# EAGLE board Pure Sequencer (EAGLE 8.7.0)
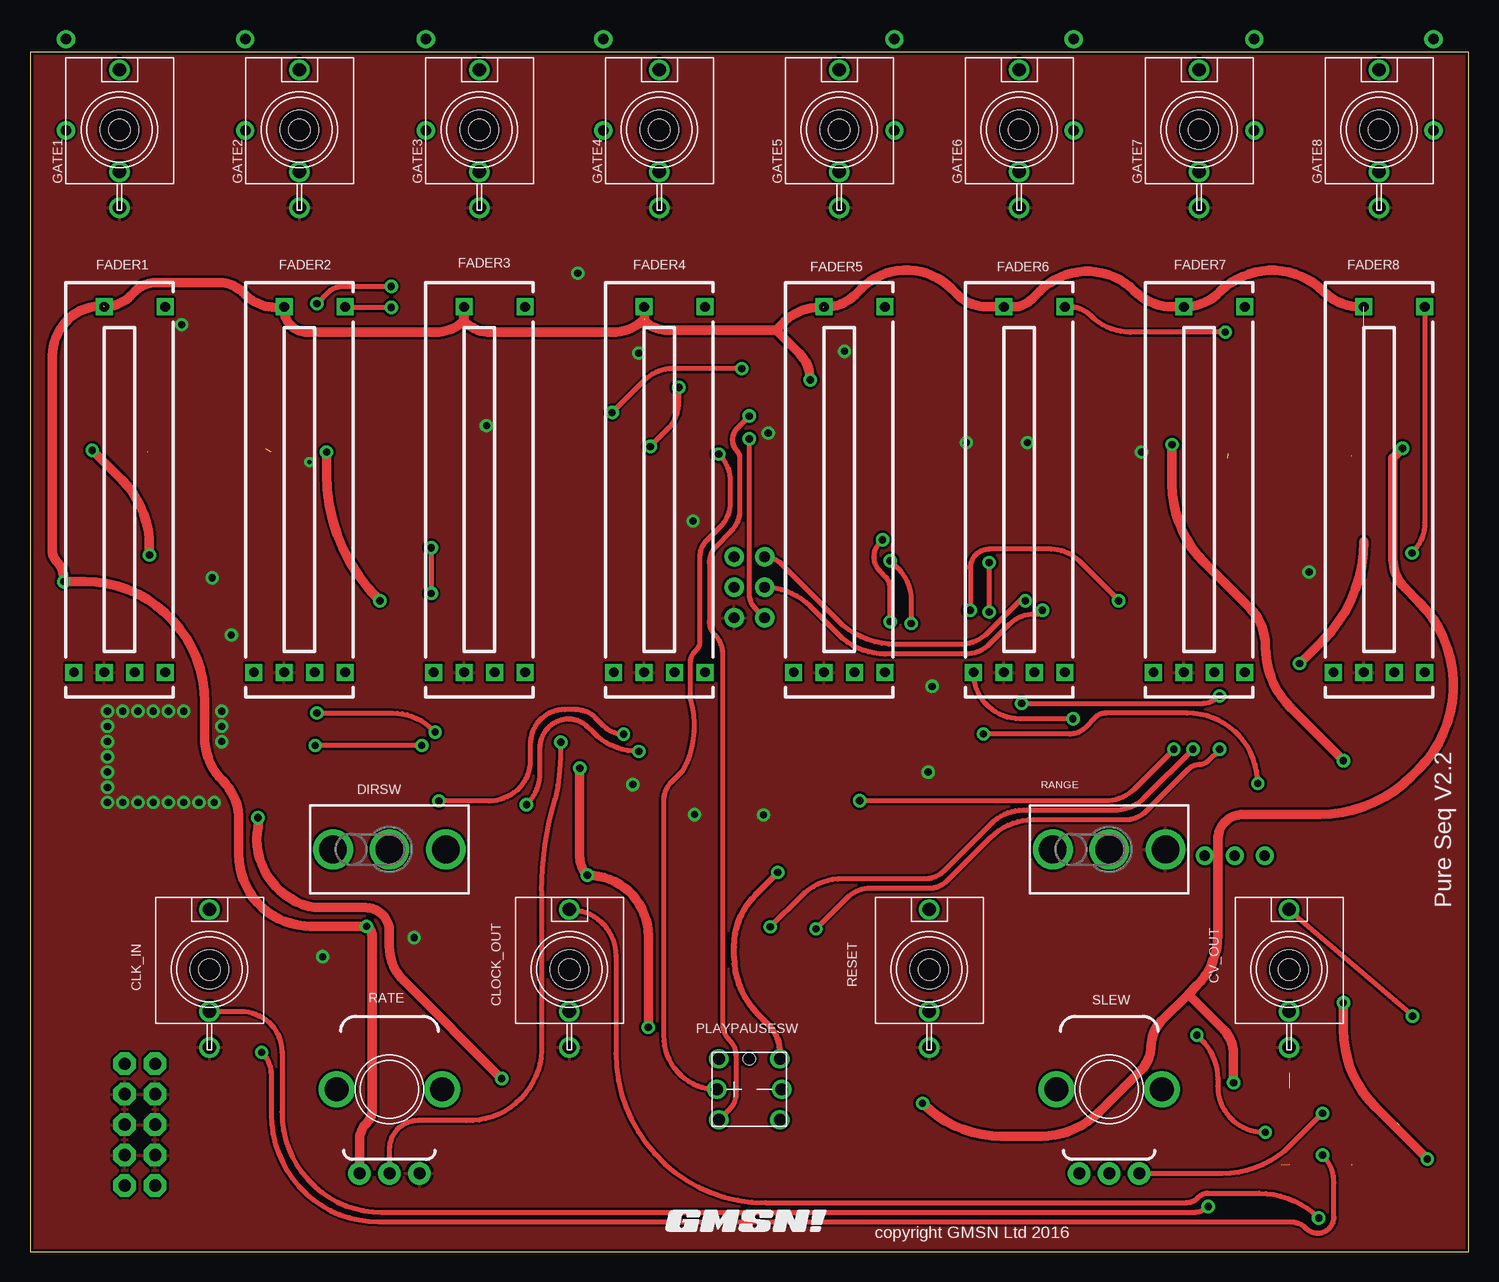
[diagram p0: board, top side]
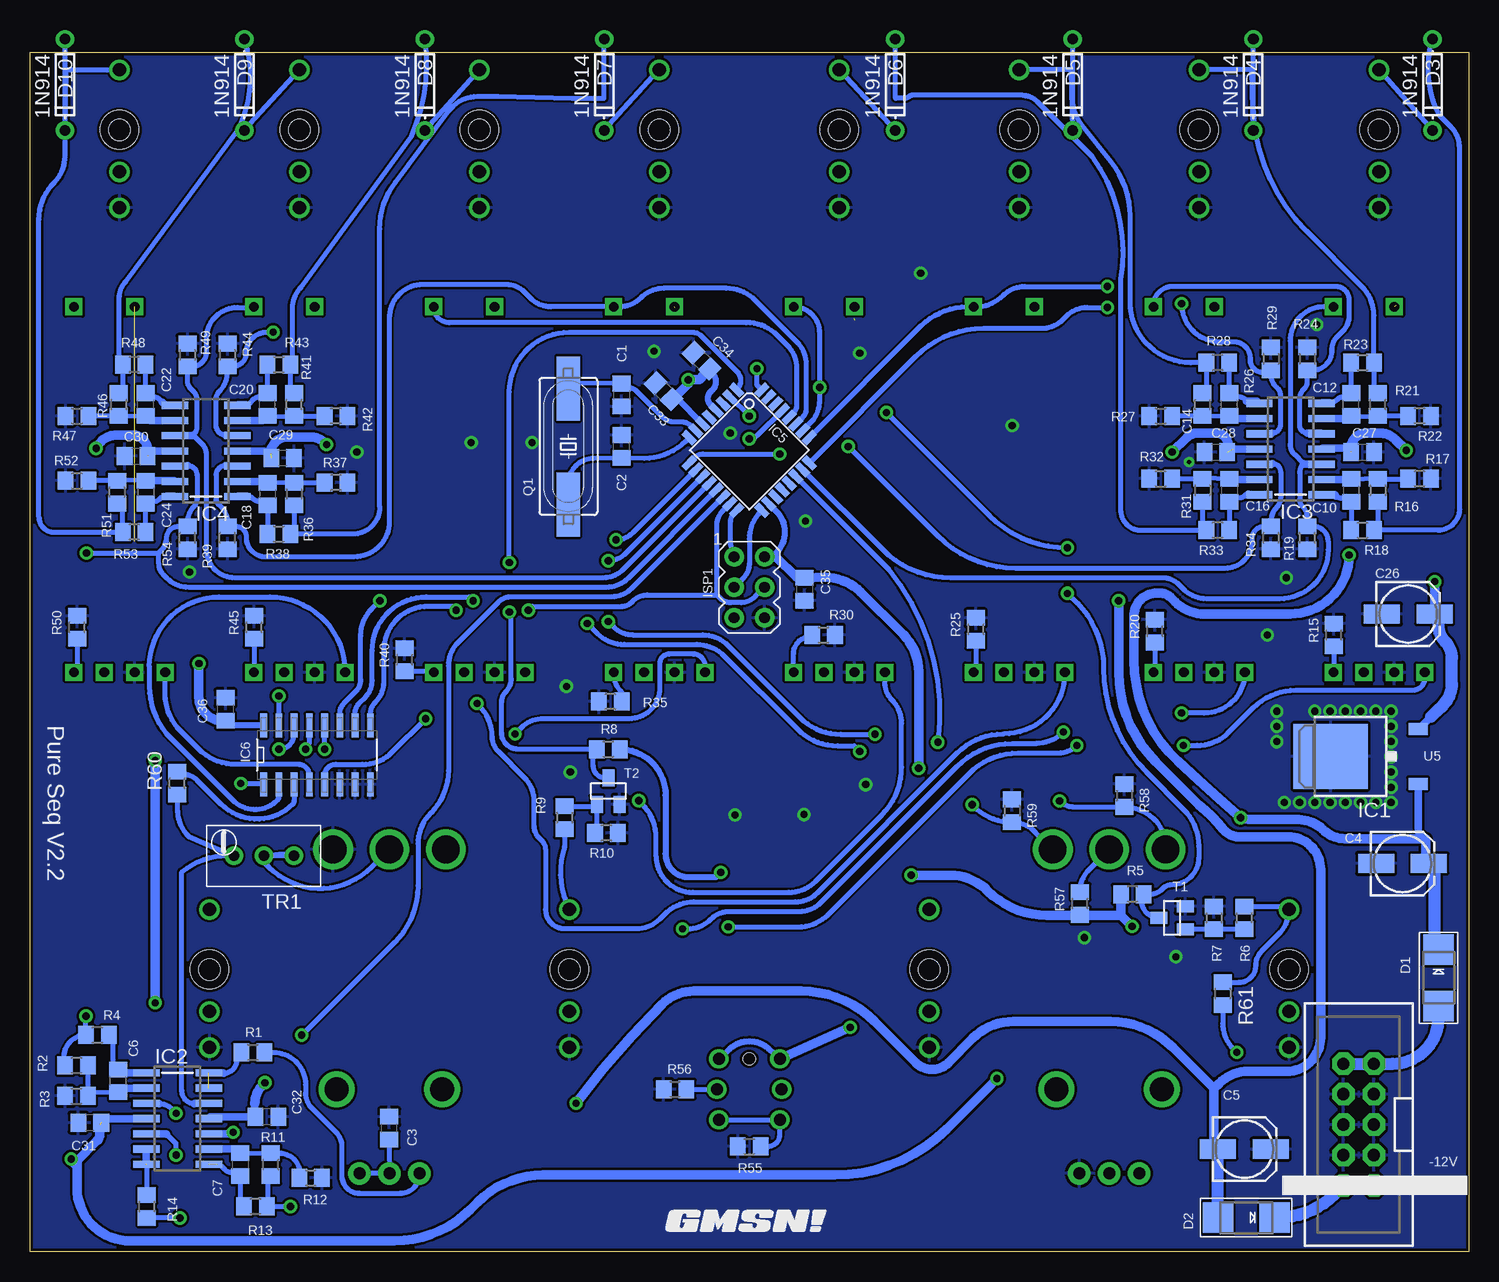
[diagram p1: board, bottom side, seen from below]

Size 119.92 x 100 mm. Coordinates in mm from the lower left corner, seen from the top.
Outline: 0,0 119.92,0 119.92,100 0,100 0,0
Copper layers (1*16): Top 0.035mm / dielectric 1.5mm / Bottom 0.035mm
Design rules "SparkFun": minimum track width 8mil, minimum drill 20mil, track to track 8mil, track to pad 8mil, pad to pad 8mil, via to via 8mil, smd to smd 8mil, copper to edge 10mil, drill to drill 8mil, minimum pad ring 12mil, minimum via ring 10mil, stop-mask expansion 4mil, vias tented up to drill 25mil, thermal gap 10mil
Holes 3.2 mm at 7.46,93.52 22.46,93.52 37.46,93.52 52.46,93.52 67.46,93.52 82.46,93.52 97.46,93.52 112.46,93.52 104.96,23.52 74.96,23.52 44.96,23.52 14.96,23.52

## Footprints (pad centres in the part's own frame; a part is rotated, then mirrored left to right if it is on the bottom)
C0805 = smd 1.3 x 1.5: 1 -0.95,0; 2 0.95,0
153CLV-0505 = smd 3 x 1.6: + 2.2,0; - -2.2,0
PJ301M-12 = drill 1.1: GND 0,-6.5; NORM 0,-3.5; TIP 0,5 | hole 1.778: 0,0
SMADIODE = smd 2.54 x 2.54: A 2.349,0; C -2.349,0
DO-41 = drill 0.9: A -3.81,0; C 3.81,0
TOGGLE_SW = drill 2.3: 1 -4.7,0; 2 0,0; 3 4.7,0
FADER_20MM_LED = drill 0.8 square: 1 -1.27,15.24; 2 -3.81,-15.24; 3 -1.27,-15.24; A 3.81,15.24; K 3.81,-15.24; P$3 1.27,-15.24
POTENTIOMETER_9MM = drill 1 pad 1.88: P$1 -2.5,-7; P$2 0,-7; P$3 2.5,-7 | drill 2 pad 2.68: P$4 -4.4,0; P$5 4.4,0
TO252 = smd 1 x 1.6: 1 -2.28,-4.8; 2 2.28,-4.8 | smd 5.4 x 6.2: 3 0,2.5
SO14 = smd 0.6 x 2.2: 1 -3.81,-2.6; 2 -2.54,-2.6; 3 -1.27,-2.6; 4 0,-2.6; 5 1.27,-2.6; 6 2.54,-2.6; 7 3.81,-2.6; 8 3.81,2.6; 9 2.54,2.6; 10 1.27,2.6; 11 0,2.6; 12 -1.27,2.6; 13 -2.54,2.6; 14 -3.81,2.6
TQFP32-08 = smd 1.27 x 0.559: 1 -4.293,2.8; 2 -4.293,2; 3 -4.293,1.2; 4 -4.293,0.4; 5 -4.293,-0.4; 6 -4.293,-1.2; 7 -4.293,-2; 8 -4.293,-2.8; 17 4.293,-2.8; 18 4.293,-2; 19 4.293,-1.2; 20 4.293,-0.4; 21 4.293,0.4; 22 4.293,1.2; 23 4.293,2; 24 4.293,2.8 | smd 0.559 x 1.27: 9 -2.8,-4.293; 10 -2,-4.293; 11 -1.2,-4.293; 12 -0.4,-4.293; 13 0.4,-4.293; 14 1.2,-4.293; 15 2,-4.293; 16 2.8,-4.293; 25 2.8,4.293; 26 2,4.293; 27 1.2,4.293; 28 0.4,4.293; 29 -0.4,4.293; 30 -1.2,4.293; 31 -2,4.293; 32 -2.8,4.293
SOIC_16 = smd 1.981 x 0.559: 1 -2.464,4.445; 2 -2.464,3.175; 3 -2.464,1.905; 4 -2.464,0.635; 5 -2.464,-0.635; 6 -2.464,-1.905; 7 -2.464,-3.175; 8 -2.464,-4.445; 9 2.464,-4.445; 10 2.464,-3.175; 11 2.464,-1.905; 12 2.464,-0.635; 13 2.464,0.635; 14 2.464,1.905; 15 2.464,3.175; 16 2.464,4.445
AVRISP = drill 0.9 pad 1.626: 1 -1.27,2.54; 2 1.27,2.54; 3 -1.27,0; 4 1.27,0; 5 -1.27,-2.54; 6 1.27,-2.54
2X5-SHROUDED = drill 1.016 pad 1.88 octagon: 1 -1.27,5.08; 2 1.27,5.08; 3 -1.27,2.54; 4 1.27,2.54; 5 -1.27,0; 6 1.27,0; 7 -1.27,-2.54; 8 1.27,-2.54; 9 -1.27,-5.08; 10 1.27,-5.08
HC49UP = smd 5.334 x 1.93: 1 -4.826,0; 2 4.826,0
R0805 = smd 1.3 x 1.5: 1 -0.95,0; 2 0.95,0
PB6149L = drill 1: 1 2.54,-2.54; 2 2.54,2.54; 3 -2.54,-2.54; 4 -2.54,2.54; A 0,-2.7; K 0,2.7 | hole 1: -2.54,0
SOT23 = smd 1 x 1.4: 1 -0.95,-1.1; 2 0.95,-1.1; 3 0,1.1
TRIMMER_TH = drill 0.9: 1 -0.802,1.143; 2 -3.302,1.143; 3 -5.802,1.143

## Placement (x,y rotation side)
C1  22pF  [C0805]  70.6,71.4 270 bottom
C2  22pF  [C0805]  70.6,67.12 90 bottom
C3  1u  [C0805]  89.96,10.29 90 bottom
C4  10uF  [153CLV-0505]  5.51,32.35 0 bottom
C5  10uF  [153CLV-0505]  18.68,8.54 0 bottom
C6  47pF  [C0805]  112.56,14.23 90 bottom
C7  47pF  [C0805]  102.39,7.25 270 bottom
C10  100pF  [C0805]  9.79,63.47 270 bottom
C12  100pF  [C0805]  9.79,70.61 90 bottom
C14  100pF  [C0805]  19.95,70.61 90 bottom
C16  100pF  [C0805]  19.95,63.47 270 bottom
C18  100pF  [C0805]  100.12,63.15 270 bottom
C20  100pF  [C0805]  100.12,70.61 90 bottom
C22  100pF  [C0805]  110.28,70.61 90 bottom
C24  100pF  [C0805]  110.28,63.31 270 bottom
C26  10uF  [153CLV-0505]  5.03,53.15 0 bottom
C27  100nF  [C0805]  8.84,66.64 0 bottom
C28  100nF  [C0805]  21.07,66.64 0 bottom
C29  100nF  [C0805]  98.85,66.16 0 bottom
C30  100nF  [C0805]  111.08,66.32 0 bottom
C31  100nF  [C0805]  114.94,10.74 180 bottom
C32  100nF  [C0805]  100.17,11.22 180 bottom
C33  100nF  [C0805]  67.1,71.72 135 bottom
C34  100nF  [C0805]  63.93,74.26 135 bottom
C35  100nF  [C0805]  55.36,55.21 270 bottom
C36  100nF  [C0805]  103.62,45.21 90 bottom
CLK_IN  PJ301M-12  [PJ301M-12]  14.96,23.52 0 top
CLOCK_OUT  PJ301M-12  [PJ301M-12]  44.96,23.52 0 top
CV_OUT  PJ301M-12  [PJ301M-12]  104.96,23.52 0 top
D1  STTH102A  [SMADIODE]  2.49,22.83 270 bottom
D2  STTH102A  [SMADIODE]  18.53,2.82 180 bottom
D3  1N914  [DO-41]  3,97.27 270 bottom
D4  1N914  [DO-41]  17.95,97.27 270 bottom
D5  1N914  [DO-41]  33,97.27 270 bottom
D6  1N914  [DO-41]  47.79,97.27 270 bottom
D7  1N914  [DO-41]  72.05,97.27 270 bottom
D8  1N914  [DO-41]  87,97.27 270 bottom
D9  1N914  [DO-41]  102.05,97.27 270 bottom
D10  1N914  [DO-41]  117,97.27 270 bottom
DIRSW  SWITCH_TOGGLE  [TOGGLE_SW]  29.96,33.52 0 top
FADER1  100k  [FADER_20MM_LED]  7.46,63.52 0 top
FADER2  100k  [FADER_20MM_LED]  22.46,63.52 0 top
FADER3  100k  [FADER_20MM_LED]  37.46,63.52 0 top
FADER4  100k  [FADER_20MM_LED]  52.46,63.52 0 top
FADER5  100k  [FADER_20MM_LED]  67.46,63.52 0 top
FADER6  100k  [FADER_20MM_LED]  82.46,63.52 0 top
FADER7  100k  [FADER_20MM_LED]  97.46,63.52 0 top
FADER8  100k  [FADER_20MM_LED]  112.46,63.52 0 top
GATE1  PJ301M-12  [PJ301M-12]  7.46,93.52 0 top
GATE2  PJ301M-12  [PJ301M-12]  22.46,93.52 0 top
GATE3  PJ301M-12  [PJ301M-12]  37.46,93.52 0 top
GATE4  PJ301M-12  [PJ301M-12]  52.46,93.52 0 top
GATE5  PJ301M-12  [PJ301M-12]  67.46,93.52 0 top
GATE6  PJ301M-12  [PJ301M-12]  82.46,93.52 0 top
GATE7  PJ301M-12  [PJ301M-12]  97.46,93.52 0 top
GATE8  PJ301M-12  [PJ301M-12]  112.46,93.52 0 top
GLIDE  B100k  [POTENTIOMETER_9MM]  89.96,13.52 0 top
IC1  BA178M05FP  [TO252]  9,41.27 90 bottom
IC2  TL074  [SO14]  107.62,11.08 270 bottom
IC3  TL074  [SO14]  14.84,66.9 90 bottom
IC4  TL074  [SO14]  105.24,66.74 90 bottom
IC5  ATMEGA328P  [TQFP32-08]  59.96,66.8 315 bottom
IC6  CD4051  [SOIC_16]  96,41.4 90 bottom
ISP1  HEADER2X3-6  [AVRISP]  59.96,55.37 0 bottom
JP1  HEADER2X5SHD  [2X5-SHROUDED]  9.16,10.58 180 bottom
Q1  20MHz  [HC49UP]  75.04,67.12 90 bottom
R1  0R  [R0805]  101.34,16.6 0 bottom
R2  34k  [R0805]  116.05,15.5 180 bottom
R3  56k  [R0805]  116.05,12.96 0 bottom
R4  0R  [R0805]  114.3,18.04 180 bottom
R5  10k  [R0805]  28.02,29.78 180 bottom
R6  100k  [R0805]  18.68,27.81 90 bottom
R7  1M  [R0805]  21.23,27.81 270 bottom
R8  10k  [R0805]  71.71,41.88 0 bottom
R9  100k  [R0805]  75.36,36.16 270 bottom
R10  1M  [R0805]  71.87,34.89 180 bottom
R11  100k  [R0805]  99.86,7.25 90 bottom
R12  100k  [R0805]  96.52,6.14 0 bottom
R13  1k  [R0805]  101.12,3.76 180 bottom
R14  1k  [R0805]  110.17,3.76 90 bottom
R15  330R  [R0805]  11.22,51.4 90 bottom
R16  100k  [R0805]  7.57,63.47 270 bottom
R17  100k  [R0805]  4.08,64.42 180 bottom
R18  1k  [R0805]  8.84,60.13 0 bottom
R19  100k  [R0805]  13.45,59.5 90 bottom
R20  330R  [R0805]  26.15,51.72 90 bottom
R21  100k  [R0805]  7.57,70.61 90 bottom
R22  100k  [R0805]  4.08,69.66 180 bottom
R23  1k  [R0805]  8.84,74.1 0 bottom
R24  100k  [R0805]  13.45,74.42 270 bottom
R25  330R  [R0805]  41.07,51.88 90 bottom
R26  100k  [R0805]  22.18,70.61 90 bottom
R27  100k  [R0805]  25.67,69.66 0 bottom
R28  1k  [R0805]  20.91,74.1 180 bottom
R29  100k  [R0805]  16.46,74.42 270 bottom
R30  330R  [R0805]  53.77,51.4 0 bottom
R31  100k  [R0805]  22.18,63.47 270 bottom
R32  100k  [R0805]  25.67,64.42 0 bottom
R33  1k  [R0805]  20.91,60.13 180 bottom
R34  100k  [R0805]  16.46,59.5 90 bottom
R35  330R  [R0805]  71.55,45.84 180 bottom
R36  100k  [R0805]  97.9,63.15 270 bottom
R37  100k  [R0805]  94.41,64.1 180 bottom
R38  1k  [R0805]  99.17,59.81 0 bottom
R39  100k  [R0805]  103.46,59.5 90 bottom
R40  330R  [R0805]  88.69,49.34 90 bottom
R41  100k  [R0805]  97.9,70.61 90 bottom
R42  100k  [R0805]  94.41,69.66 180 bottom
R43  1k  [R0805]  99.17,73.94 0 bottom
R44  100k  [R0805]  103.46,74.74 270 bottom
R45  330R  [R0805]  101.23,52.04 90 bottom
R46  100k  [R0805]  112.51,70.61 90 bottom
R47  100k  [R0805]  116,69.66 0 bottom
R48  1k  [R0805]  111.24,73.94 180 bottom
R49  100k  [R0805]  106.79,74.74 270 bottom
R50  330R  [R0805]  116,52.04 90 bottom
R51  100k  [R0805]  112.67,63.31 270 bottom
R52  100k  [R0805]  116,64.26 0 bottom
R53  1k  [R0805]  111.24,59.97 180 bottom
R54  100k  [R0805]  106.79,59.5 90 bottom
R55  100k  [R0805]  59.96,8.76 0 bottom
R56  330R  [R0805]  66.15,13.52 0 bottom
R57  1k  [R0805]  32.4,29.02 90 bottom
R58  100k  [R0805]  28.69,38.01 270 bottom
R59  100k  [R0805]  38.05,36.74 270 bottom
R60  200k  [R0805]  107.64,39.04 90 bottom
R61  100k  [R0805]  20.5,21.5 270 bottom
RANGE  SWITCH_TOGGLE  [TOGGLE_SW]  89.96,33.52 0 top
RATE  B100k  [POTENTIOMETER_9MM]  29.96,13.52 0 top
RESET  PJ301M-12  [PJ301M-12]  74.96,23.52 0 top
SW1  [PB6149L]  59.96,13.52 270 top
T1  MMBT3904  [SOT23]  24.72,27.81 90 bottom
T2  MMBT3904  [SOT23]  71.71,38.38 0 bottom
TR1  100k  [TRIMMER_TH]  103.73,34.14 180 bottom
U$1  [GMSN!_LOGO]  59.96,2.48 0 top
U$2  [GMSN!_LOGO]  59.96,2.48 0 bottom

## Library data of the parts
C1-C3 C6 C7 C10 C12 C14 C16 C18 C20 C22 C24 C27-C36 = GMSN; SORT: 3
C4 C5 C26 = GMSN; SORT: 6
CLK_IN CLOCK_OUT CV_OUT GATE1-GATE8 GLIDE RATE RESET = GMSN; SORT: 8
D1-D10 = GMSN; SORT: 1
DIRSW RANGE SW1 = GMSN; SORT: 9
FADER1-FADER8 ISP1 JP1 TR1 = GMSN; SORT: 7
IC1-IC6 T1 T2 = GMSN; SORT: 4
Q1 = GMSN; SORT: 5
R1-R61 = GMSN; SORT: 2
U$1 U$2 = gmsnLogo

## Nets
5V: C26.+ C33.1 C34.1 C35.1 C36.1 FADER1.1 FADER2.1 FADER3.1 FADER4.1 FADER5.1 FADER6.1 FADER7.1 FADER8.1 IC1.2 IC5.4 IC5.6 IC5.18 IC6.16 ISP1.2 R5.2 R8.2 R57.1 RATE.P$1 SW1.3 SW1.4
+12V: C4.+ C27.1 C29.1 C31.1 D1.C IC1.1 IC2.4 IC3.4 IC4.4
-12V: C5.- C28.2 C30.2 C32.2 D2.A IC2.11 IC3.11 IC4.11
A: IC5.15 IC6.11 ISP1.4
B: IC5.16 IC6.10 ISP1.1
C: IC5.17 IC6.9 ISP1.3
CLK_IN: IC5.32 R5.1 T1.3
CLK_OUT: IC2.10 IC5.14
G0: FADER1.A IC3.3 IC5.23 R19.2
G1: FADER2.A IC3.5 IC5.24 R24.2
G2: FADER3.A IC3.10 IC5.25 R29.2
G3: FADER4.A IC3.12 IC5.26 R34.2
G4: FADER5.A IC4.3 IC5.27 R39.2
G5: FADER6.A IC4.5 IC5.28 R44.2
G6: FADER7.A IC4.10 IC5.12 R49.2
G7: FADER8.A IC4.12 IC5.13 R54.2
GND: C1.2 C2.2 C3.2 C4.- C5.+ C26.- C27.2 C28.1 C29.2 C30.1 C31.2 C32.1 C33.2 C34.2 C35.2 C36.2 CLK_IN.GND CLOCK_OUT.GND CV_OUT.GND FADER1.3 FADER2.3 FADER3.3 FADER4.3 FADER5.3 FADER6.3 FADER7.3 FADER8.3 GATE1.GND GATE2.GND GATE3.GND GATE4.GND GATE5.GND GATE6.GND GATE7.GND GATE8.GND IC1.3 IC5.3 IC5.5 IC5.21 IC6.6 IC6.7 IC6.8 ISP1.6 JP1.3 JP1.4 JP1.5 JP1.6 JP1.7 JP1.8 R3.1 R7.1 R10.1 R12.2 R15.2 R17.1 R19.1 R20.2 R22.1 R24.1 R25.2 R27.1 R29.1 R30.2 R32.1 R34.1 R35.2 R37.1 R39.1 R40.2 R42.1 R44.1 R45.2 R47.1 R49.1 R50.2 R52.1 R54.1 R55.1 R56.1 R58.1 R59.1 RANGE.3 RATE.P$3 RESET.GND T1.2 T2.2
N$1: C1.1 IC5.7 Q1.2
N$2: C2.1 IC5.8 Q1.1
N$3: IC2.12 R60.1 TR1.1
N$4: IC2.13 IC2.14 R1.1
N$5: GLIDE.P$1 R1.2
N$6: FADER8.2 IC6.4
N$7: FADER7.2 IC6.2
N$8: FADER6.2 IC6.5
N$9: D1.A JP1.9 JP1.10
N$10: D2.C JP1.1 JP1.2
N$11: FADER5.2 IC6.1
N$12: FADER4.2 IC6.12
N$13: FADER3.2 IC6.15
N$14: FADER2.2 IC6.14
N$15: FADER1.2 IC6.13
N$16: C3.1 GLIDE.P$2 GLIDE.P$3 IC2.3
N$17: R6.1 R7.2 T1.1
N$18: IC2.5 R61.2
N$19: C6.1 IC2.2 R2.1 R3.2
N$20: C6.2 IC2.1 R4.1
N$21: CV_OUT.TIP R2.2 R4.2
N$22: R9.1 R10.2 T2.1
N$23: R9.2 RESET.TIP
N$24: C7.1 IC2.9 R11.2 R12.1
N$25: C7.2 IC2.8 R13.2
N$26: CLK_IN.TIP R6.2 R61.1
N$27: IC2.6 IC2.7 R14.2
N$28: CLOCK_OUT.TIP R14.1
N$29: CLK_IN.NORM R11.1 R13.1
N$30: IC5.22 RATE.P$2
N$31: FADER1.K R15.1
N$32: C10.1 IC3.2 R16.1 R17.2
N$33: C10.2 IC3.1 R18.1
N$34: D3.A R16.2 R18.2
N$35: FADER3.K R25.1
N$36: FADER2.K R20.1
N$37: C12.1 IC3.6 R21.1 R22.2
N$38: C12.2 IC3.7 R23.1
N$39: D4.A R21.2 R23.2
N$40: C14.1 IC3.9 R26.1 R27.2
N$41: C14.2 IC3.8 R28.1
N$42: D5.A R26.2 R28.2
N$43: FADER4.K R30.1
N$44: C16.1 IC3.13 R31.1 R32.2
N$45: C16.2 IC3.14 R33.1
N$46: D6.A R31.2 R33.2
N$47: FADER5.K R35.1
N$48: C18.1 IC4.2 R36.1 R37.2
N$49: C18.2 IC4.1 R38.1
N$50: D7.A R36.2 R38.2
N$51: FADER6.K R40.1
N$52: C20.1 IC4.6 R41.1 R42.2
N$53: C20.2 IC4.7 R43.1
N$54: D8.A R41.2 R43.2
N$55: FADER7.K R45.1
N$56: C22.1 IC4.9 R46.1 R47.2
N$57: C22.2 IC4.8 R48.1
N$58: D9.A R46.2 R48.2
N$59: FADER8.K R50.1
N$60: C24.1 IC4.13 R51.1 R52.2
N$61: C24.2 IC4.14 R53.1
N$62: D10.A R51.2 R53.2
N$63: IC5.2 R55.2 SW1.1 SW1.2
N$64: IC5.9 SW1.A
N$65: R56.2 SW1.K
N$66: DIRSW.2 R57.2
N$67: DIRSW.1 IC5.10 R58.2
N$68: DIRSW.3 IC5.11 R59.2
N$69: IC6.3 R60.2
N$70: RANGE.2 TR1.2 TR1.3
N$71: D6.C GATE4.TIP
N$72: D5.C GATE3.TIP
N$73: D4.C GATE2.TIP
N$74: D3.C GATE1.TIP
N$75: D10.C GATE8.TIP
N$76: D9.C GATE7.TIP
N$77: D8.C GATE6.TIP
N$78: D7.C GATE5.TIP
RESET: IC5.1 R8.1 T2.3
RST: IC5.29 ISP1.5

## Tracks (layer width: path | path; a pad name or v marks a point on that pad's centre or on a via)
5V  (via drill 0.6)  (4 unrouted)
  Top 0.5: SW1.4 62.5,16.64 arc45 61.56,18.91 60.64,19.82 arc-45 58.69,24.54 58.69,25.38 arc-45 60.51,29.77 v62.34,31.61
  Top 0.8: RATE.P$1 27.46,9.26 arc-45 28.06,10.71 arc45 28.53,11.83 28.53,26.12 arc45 28.05,27.27 v28.05,27.11 23.39,27.11 arc-90 17.41,33.09 17.41,35.97 arc45 16.04,39.28 arc-45 14.56,42.87 14.56,45.83 arc90 4.54,55.85 v2.81,55.85 2.81,56.09 arc45 2.2,57.57 arc-45 1.86,58.39 1.86,74.64 arc-90 6.08,78.86 | 62.55,16.06 SW1.4 | 51.19,77.63 51.23,77.59 arc45 53.14,76.8 62.18,76.8 | 62.18,76.8 62.9,77.52 arc-45 65.77,78.71 66.14,78.71 | 111.19,59.2 arc-45 107.77,50.95 v105.84,49.02 | 62.18,76.8 64.14,74.84 arc-45 v65.04,72.67 | v51.55,18.69 51.55,26.29 arc90 v46.47,31.37 arc-45 45.83,32.9 v45.83,40.29 | FADER1.1 arc45 8.37,79.66 8.78,80.07 arc-45 10.46,80.77 15.84,80.77 arc-45 17.71,80 17.93,79.78 arc45 20.52,78.71 21.14,78.71 FADER2.1 21.19,78.51 arc90 23.06,76.64 33.85,76.64 arc45 36.15,77.59 36.15,78.72 FADER3.1 36.19,77.55 arc45 38.39,76.64 48.55,76.64 arc45 51.23,77.75 51.23,78.72 FADER4.1 | FADER5.1 66.4,78.76 arc45 68.78,79.75 69.3,80.26 arc-90 76.82,80.26 77.32,79.76 arc45 79.74,78.76 FADER6.1 81.99,78.76 arc45 83.5,79.39 84.2,80.08 arc-90 92.08,80.08 arc45 95.27,78.76 FADER7.1 arc45 99.2,80.01 arc-90 107.87,80.01 arc45 110.88,78.76 FADER8.1
  Bottom 0.4: R57.1 32.34,28.04
  Bottom 0.5: IC6.16 103.27,43.86 C36.1 | IC5.4 63.19,70.6 arc90 63.19,71.66 63.02,71.84 arc-90 63.02,73.19 63.22,73.39 C34.1 | IC5.6 66,71.14 66,71.41 | IC5.18 57.74,61.75 arc90 57.74,58.23 57.74,57.91 | R8.2 arc90 66.94,38.06 66.94,33.15 arc-90 65.01,31.21 62.73,31.21 v62.34,31.61 | SW1.3 58.33,16.88 arc-84 61.59,16.88 SW1.4
  Bottom 0.61: 2.72,44.99 4.15,43.55 IC1.2
  Bottom 0.8: v2.81,55.85 2.83,55.82 C26.+ | v105.84,49.02 105.84,46.19 arc-90 103.9,44.26 103.66,44.26 C36.1 | C34.1 64.1,72.67 v65.04,72.67 65.04,72.37 66,71.41 C33.1 | ISP1.2 57.74,57.91 56.04,56.21 C35.1 53.66,56.21 arc45 50.68,54.98 47.13,51.43 arc45 45.83,48.3 v45.83,40.29 | v51.55,18.69 SW1.3 | R5.2 28.97,28.04 | 28.97,28.04 v28.05,27.11 | v46.47,31.37 43.22,31.37 arc45 40.09,30.08 arc-45 35.17,28.04 32.34,28.04 28.98,28.04 28.97,28.04
  Bottom 1.016: 3.13,44.57 2.72,44.99 2.08,45.62 arc-45 1.38,47.32 1.38,49.46 arc-45 1.97,50.88 arc45 2.49,52.14 2.49,52.81 C26.+
+12V  (via drill 0.6)  (3 unrouted)
  Top 0.8: v9.95,58.07 9.95,58.83 arc45 7.69,64.3 v5.19,66.8 | v95.2,67.28 95.2,63.94 arc45 97.9,57.44 101.68,53.66 arc-45 102.98,50.51 102.98,50.44 arc45 105.11,45.3 v109.49,40.92 | v39.32,14.41 31.13,22.6 arc-45 29.96,25.44 29.96,26.68 arc90 27.97,28.67 23.74,28.67 arc-90 19,35.41 v19,36.16 | v109.49,20.74 109.49,18.49 arc45 112.17,12.03 v116.47,7.72
  Bottom 0.61: IC1.1 4.2,35.01 3.57,34.38 | IC2.4 113.64,11.08 C31.1 | IC4.4 100.38,66.74 C29.1 | IC3.4 12.15,66.99 9.79,66.99
  Bottom 0.8: C31.1 113.94,10.68 | 3.57,32.61 3.57,34.38 3.6,34.42 10.31,34.42 arc45 12.14,35.17 arc-45 14.14,36 18.37,36 v19,36.16 arc2 24.24,40.9 arc47 27.89,49.3 27.89,52.98 arc90 25.98,54.89 25.67,54.89 arc45 24.86,54.56 24.45,54.15 arc-45 22.02,53.15 14.88,53.15 arc-90 v9.95,58.07 | v5.19,66.8 6.1,67.71 arc-45 7.36,68.23 8.55,68.23 arc-90 9.79,66.99 9.79,66.69 | v39.32,14.41 43.49,10.25 arc45 52.83,6.38 77.15,6.38 arc-45 82.61,4.12 83.23,3.5 arc45 89.52,0.89 111.58,0.89 arc90 116,5.3 116,7.08 | 99.85,66.52 arc90 98.46,67.91 96.57,67.91 arc45 95.32,67.39 v95.2,67.28 | v109.49,40.92 v109.49,20.74 | 116,7.08 116,7.56 114.34,9.21 arc-45 114.09,9.82 114.09,10.58 | v116.47,7.72 116.47,7.56 116,7.08
  Bottom 1.016: D1.C 2.81,25.49 2.81,32.03 3.13,32.35 C4.+ 3.57,32.61
-12V  (via drill 0.6)  (2 unrouted)
  Top 0.8: v114.41,66.96 113.62,66.16 113.62,57.71 arc45 114.6,55.34 115.78,54.16 arc-90 115.78,40.22 115.17,39.61 arc-45 107.53,36.45 101.15,36.45 arc90 99.01,34.31 99.01,26.35 arc-45 97.29,22.18 96.55,21.45 | v29.16,54.26 29.04,54.38 arc-45 24.72,64.82 v24.72,66.64 | v74.41,12.35 arc45 80.99,9.62 84.3,9.62 arc45 89.09,11.61 92.63,15.15 arc45 93.46,17.14 arc-45 94.31,19.21 96.55,21.45 | v100.33,14.07 100.33,16.51 arc45 99.51,18.49 96.55,21.45
  Bottom 0.61: IC2.11 104.88,11.22 C32.2 101.17,11.27 101.17,12.31 | IC4.11 110.03,66.74 110.12,66.83 | IC3.11 19.67,66.9 20.07,67.3
  Bottom 0.8: 21.23,13.59 24.66,17.03 arc-45 29.85,19.18 37.93,19.18 arc-45 41.34,17.76 43.37,15.73 arc90 46.07,15.73 49.51,19.18 arc-45 55.64,21.71 64.58,21.71 arc-45 67.22,20.62 arc-8 v74.41,12.35 | v100.33,14.07 100.52,13.88 arc-45 101.17,12.31 | v114.41,66.96 114.41,67.12 114,67.53 arc45 112.69,68.07 111.36,68.07 arc90 110.12,66.83 110.12,66.37 | v29.16,54.26 29.16,48.28 arc-45 26.07,40.83 22.5,37.25 arc13 20.43,35.18 arc-51 19.17,34.57 15.03,34.57 arc90 12.34,31.87 12.34,17.83 arc90 15.14,15.02 18.41,15.02 arc-45 20.78,14.04 21.23,13.59 | v24.72,66.64 23.49,67.87 arc45 22.62,68.23 21,68.23 arc90 20.07,67.3 | 21.23,13.59 21.23,8.88 C5.-
  Bottom 1.016: D2.A 20.89,2.83 C5.-
A  (via drill 0.6)
  Top 0.4: v90.76,54.26 87.43,57.59 arc45 85.12,58.55 79.95,58.55 arc90 78.38,56.97 v78.38,53.46
  Bottom 0.4: ISP1.4 59.48,54.58 arc45 60.65,54.1 61.52,54.1 arc45 62.38,54.45 62.66,54.73 | 62.66,54.73 62.66,60.5 arc45 62.11,61.82 IC5.15 | IC6.11 94.09,44.84 arc45 93.72,45.74 92.73,46.73 arc-45 92.34,47.66 92.34,51.35 arc45 91.41,53.61 v90.76,54.26 | v78.38,53.46 78.06,53.78 70.59,53.78 arc-45 69.78,54.12 69.67,54.23 arc45 68.46,54.73 62.66,54.73
B  (via drill 0.6)
  Top 0.4: v82.98,54.26 82.5,54.26 79.81,51.57 arc-45 77.5,50.61 72.2,50.61 arc-45 67.3,52.64 62.59,57.35 arc45 ISP1.1
  Bottom 0.4: IC5.16 61.17,61.63 arc-45 61.55,60.72 61.55,59.15 arc-45 61.23,58.39 ISP1.1 | IC6.10 92.82,44.87 arc45 92.47,45.72 91.95,46.24 arc-45 91.39,47.59 91.39,50.08 arc90 86.9,54.58 83.3,54.58 v82.98,54.26
C  (via drill 0.6)
  Top 0.4: ISP1.3 arc-45 65.02,53.8 67.39,51.43 arc45 71.3,49.81 78,49.81 arc45 79.99,50.64 81.66,52.31 arc-45 83.69,53.15 84.09,53.15 v84.41,53.46
  Bottom 0.4: IC5.17 59.04,61.65 arc-45 59.96,59.43 59.96,57.32 arc45 60.44,56.16 ISP1.3 | v84.41,53.46 84.72,53.78 86.72,53.78 arc-90 90.44,50.06 90.44,47.49 arc45 91.16,45.76 arc-45 91.55,44.81 IC6.9
CLK_IN  (via drill 0.6)
  Top 0.4: v59.33,73.6 53.56,73.6 arc45 51.2,72.62 v48.53,69.95 | v33.45,58.68 v33.45,54.87
  Bottom 0.4: IC5.32 59.33,72.24 v59.33,73.6 | v48.53,69.95 39.95,61.37 arc-45 v33.45,58.68 | v33.45,54.87 32.63,54.04 arc45 30.43,48.75 30.43,48.62 arc-45 26.83,39.93 23.75,36.85 arc45 22.5,33.81 22.5,32.81 arc90 24.73,30.58 arc-45 25.52,30.25 25.62,30.15 arc45 26.5,29.78 R5.1 27.26,29.6 27.26,29.25 arc-90 T1.3
CLK_OUT  (via drill 0.6)
  Top 0.4: v97.27,18.04 97.66,17.64 arc-45 99.01,14.38 99.01,13.78 arc90 102.86,9.94 v102.98,9.94
  Bottom 0.4: IC5.14 69.82,55.24 arc45 71.42,54.58 79.79,54.58 arc-45 80.9,54.12 84.25,50.76 arc-45 85.04,48.85 85.04,40.1 arc45 86.5,36.58 86.51,36.57 arc-45 87.58,33.98 87.58,30.48 arc45 89.54,25.77 v97.27,18.04 | v102.98,9.94 103.13,9.79
  Bottom 0.61: IC2.10 103.11,9.81 v102.98,9.94
G0
  Bottom 0.4: FADER1.A 12.03,78.76 arc-90 14.88,75.91 14.88,67.28 arc-45 14.54,66.46 13.76,65.69 arc-45 14.08,64.92 14.08,62.71 arc-45 13.83,62.1 13.82,62.09 arc45 13.45,61.19 R19.2 12.94,60.45 arc90 11.7,59.21 11.7,58.48 arc90 15.77,54.42 21.84,54.42 arc45 23.77,55.22 24.16,55.6 arc-45 25.51,56.16 43.19,56.16 arc45 48.84,58.5 IC5.23
  Bottom 0.61: IC3.3 13.7,65.63 13.76,65.69
G1  (via drill 0.6)
  Top 0.4: v30.11,78.71 26.32,78.71 FADER2.A
  Bottom 0.4: 13.43,68.23 arc90 14.08,68.88 14.08,71.03 arc45 13.71,71.94 13.65,71.99 arc-45 13.45,72.49 R24.2 13.02,73.47 arc-90 11.38,75.1 11.38,75.24 arc45 10.95,76.28 10.42,76.81 arc-45 9.95,77.94 9.95,79.33 arc-90 11.08,80.45 24.65,80.45 arc-90 26.3,78.8 FADER2.A | IC5.24 46.06,74.63 arc45 40.44,76.96 35.59,76.96 arc-45 33.83,77.69 33.54,77.98 arc45 31.79,78.71 v30.11,78.71
  Bottom 0.61: IC3.5 12.3,68.23 13.43,68.23
G2  (via drill 0.6)
  Top 0.4: v30.11,80.45 26.09,80.45 arc45 24.83,79.93 v23.92,79.02
  Bottom 0.4: 16.38,68.23 arc-90 15.67,68.94 15.67,71.37 arc-45 15.92,71.97 16.09,72.14 arc45 16.46,73.04 R29.2 16.62,73.31 17.19,73.31 arc90 18.21,74.33 18.21,74.48 arc-90 19.57,75.85 20.75,75.85 arc90 v23.92,79.02 | IC5.25 45.63,77.17 arc45 41.79,78.76 FADER3.A 41.08,78.76 arc-45 38.8,79.7 arc45 36.99,80.45 v30.11,80.45
  Bottom 0.61: IC3.10 16.44,68.17 16.38,68.23
G3  (via drill 0.6)
  Top 0.4: v51.7,67.12 53.15,68.56 arc45 54.09,70.83 v54.09,72.04
  Bottom 0.4: 16.34,65.69 arc90 15.67,65.02 15.67,62.83 arc45 16,62.02 16.03,61.99 arc-45 16.46,60.95 R34.2 17.04,60.45 arc-90 18.05,59.43 18.05,59.2 arc90 20.3,56.96 37.74,56.96 arc45 44.23,59.64 v51.7,67.12 | IC5.26 54.88,69.05 arc-45 54.09,70.97 v54.09,72.04 54.09,76.58 arc-90 FADER4.A
  Bottom 0.61: IC3.12 16.4,65.63 16.34,65.69
G4
  Bottom 0.4: 103.62,65.53 arc-90 104.41,64.74 104.41,62.72 arc-45 104.26,62.37 104,62.1 arc45 103.46,60.79 R39.2 102.77,60.45 arc90 101.87,59.55 101.87,59.5 arc-90 100.28,57.91 92.92,57.91 arc-90 89.96,60.86 89.96,77.83 arc90 87.19,80.61 80.19,80.61 arc45 78.72,80 78.16,79.44 arc-45 76.51,78.76 FADER5.A 70.79,78.76 arc-45 69.02,79.49 arc45 67.08,80.29 61.87,80.29 arc45 59.42,79.28 56.01,75.87 arc45 55.2,73.91 55.2,70.26 arc45 55.48,69.58 IC5.27
  Bottom 0.61: IC4.3 103.56,65.47 103.62,65.53
G5  (via drill 0.6)
  Top 0.4: v99.65,76.64 91.74,76.64 arc-45 88.44,78.01 arc45 86.63,78.76 FADER6.A
  Bottom 0.4: 103.62,68.07 arc90 104.41,68.86 104.41,71.08 arc45 104.18,71.64 arc-45 103.46,73.38 R44.2 103.04,73.79 arc-90 101.87,74.95 arc90 100.18,76.64 v99.65,76.64 | IC5.28 56.27,69.92 arc-45 55.99,70.6 55.99,73.64 arc-45 56.77,75.51 57.63,76.37 arc-45 60.19,77.44 84.95,77.44 arc90 FADER6.A
  Bottom 0.61: IC4.5 103.56,68.01 103.62,68.07
G6
  Bottom 0.4: FADER7.A 101.32,78.71 102.62,78.71 arc-90 105.2,76.12 105.2,74.99 arc90 106.41,73.79 R49.2 106.79,72.59 arc-45 106.51,71.92 106.31,71.72 arc45 106,70.96 106,68.72 arc45 106.23,68.16 106.31,68.07 105.6,67.36 arc45 105.2,66.4 105.2,58.52 arc-90 102.84,56.16 72.15,56.16 arc-45 70.47,56.86 IC5.12
  Bottom 0.61: 106.31,68.07 106.38,68.01 IC4.10
G7  (via drill 0.6)
  Top 0.4: FADER8.A 116.27,60.8 arc-45 v115.2,58.23
  Bottom 0.4: 106.79,65.53 arc90 106,64.74 106,62.75 arc45 106.28,62.07 arc-45 106.79,60.84 R54.2 107.56,60.45 arc-90 108.54,59.47 arc45 108.97,58.43 109.17,58.23 | v115.2,58.23 109.17,58.23 | IC5.13 70.08,56.11 arc45 71.88,55.37 106.68,55.37 arc45 108.49,56.12 108.8,56.42 arc45 109.17,57.33 109.17,58.23
  Bottom 0.61: IC4.12 106.85,65.47 106.79,65.53
GND  (via drill 0.35, 0.6)
  other vias: 24.4,24.57 32.02,26.16 16.78,51.4 15.19,56.16 38.05,68.86 45.67,81.56 50.75,74.9 61.55,68.23 67.9,75.05 78.06,67.44 83.14,67.44 92.66,66.64 106.63,56.64 75.2,47.11 74.88,39.97 12.65,77.28 6.46,41.24 6.46,42.51 6.46,43.78 6.46,38.7 6.46,39.97 6.46,45.05 7.73,45.05 9,45.05 10.27,45.05 11.54,45.05 12.81,45.05 6.46,37.43 7.73,37.43 9,37.43 10.27,37.43 11.54,37.43 12.81,37.43 14.08,37.43 15.35,37.43 15.99,45.05 15.99,43.78 15.99,42.51 50.25,38.93 55.4,36.43 61.15,36.4 55.27,60.91 23.29,65.82
  pour Bottom: 0,100 119.92,100 119.92,0 0,0
  pour Top: 0,100 119.92,100 119.92,0 0,0
N$1
  Bottom 0.4: Q1.2 75.2,73.85 75.2,71.88 74.68,72.4 C1.1 70.48,72.4 70.12,72.04 arc45 69.31,71.7 67.14,69.53 arc-45 66.28,69.18 65.67,69.18 arc45 64.81,68.82 IC5.7
N$2
  Bottom 0.4: IC5.8 65.3,67.54 arc45 68.72,66.12 C2.1 72.94,66.12 arc-90 75.04,64.02 Q1.1
N$3
  Bottom 0.4: 106.22,12.33 arc45 106.94,12.63 arc45 107.27,13.42 107.27,31.63 arc45 TR1.1 106.7,34.61 arc45 107.64,36.89 R60.1
  Bottom 0.61: IC2.12 106.19,12.35 106.22,12.33
N$4  (1 unrouted)
  Bottom 0.4: 103.78,14.87 arc-90 102.66,15.99 102.66,16.23 R1.1
  Bottom 0.61: IC2.14 103.81,14.89 103.78,14.87
N$5
  Bottom 0.4: R1.2 99.64,16.6 arc90 96.95,13.91 96.95,13.21 arc-45 96.44,11.97 94.42,9.95 arc45 93.93,8.78 93.93,6.32 arc-90 92.47,4.86 89.05,4.86 arc-90 87.42,6.48 GLIDE.P$1
N$6
  Bottom 0.4: IC6.4 96.63,39.71 arc-90 97.53,40.61 102.8,40.61 arc45 105.82,41.86 107.37,43.41 arc45 108.65,46.49 FADER8.2
N$7
  Bottom 0.4: IC6.2 99.17,37.91 arc45 99.28,37.64 arc90 103.03,37.64 108.19,42.8 arc45 109.97,47.09 109.97,48.76 arc90 104.15,54.58 99.93,54.58 arc90 93.65,48.3 FADER7.2
N$8  (via drill 0.6)
  Top 0.4: v86.95,44.42 82.51,44.42 arc-90 FADER6.2
  Bottom 0.4: IC6.5 95.36,39.68 arc90 94.44,40.61 92.21,40.61 arc-45 89.73,41.63 v86.95,44.42
N$9
  Bottom 1.016: JP1.10 JP1.9 6.33,15.66 arc-90 2.49,19.5 D1.A
N$10
  Bottom 1.016: JP1.1 JP1.2 11.17,4.76 arc45 15.85,2.82 D2.C
N$11  (via drill 0.6)
  Top 0.4: v102.35,39.02 arc90 96.47,44.89 89.65,44.89 arc45 88.83,44.55 87.94,43.67 arc-45 86.69,43.15 v79.49,43.15
  Bottom 0.4: FADER5.2 63.65,48.83 arc-90 64.64,49.81 66.63,49.81 arc-90 67.42,49.02 67.42,46.98 arc90 69.98,44.42 77.13,44.42 arc-45 78.99,43.65 v79.49,43.15 | v102.35,39.02 100.52,39.02 IC6.1
N$12  (via drill 0.6)
  Top 0.4: v69.17,37.59 89.63,37.59 arc45 92.1,38.61 v95.36,41.88
  Bottom 0.4: v95.36,41.88 IC6.12 | v69.17,37.59 68.86,37.28 arc45 67.74,34.58 67.74,32.99 arc-90 64.69,29.94 56.67,29.94 arc-45 54.43,30.87 48.9,36.39 arc-45 47.26,40.36 47.26,44.03 arc-45 48.07,46 arc45 48.65,47.39 FADER4.2
N$13  (via drill 0.6)
  Top 0.4: v82.66,45.69 97.64,45.69 arc45 v99.17,46.32
  Bottom 0.4: FADER3.2 arc90 38.78,43.15 38.85,43.15 arc-45 42.59,41.6 54.28,29.91 arc45 56.12,29.15 64.58,29.15 arc-45 66.99,28.15 67.42,27.73 arc45 69.35,26.93 75.38,26.93 arc90 76.95,28.5 76.95,33.57 arc-45 77.21,34.2 77.48,34.47 arc45 77.9,35.48 77.9,37.58 arc-45 78.69,39.49 80.88,41.68 arc45 81.39,42.92 arc-45 82.45,45.47 v82.66,45.69 | v99.17,46.32 IC6.15
N$14  (via drill 0.6)
  Top 0.4: v23.92,44.89 30.22,44.89 arc-45 33.57,43.5 v33.77,43.3 | v99.17,41.88 98.18,40.89 arc-45 97.51,40.61 arc45 96.55,40.21 93.07,36.73 arc-45 91.32,36 83.63,36 arc45 80.08,34.53 76.44,30.89 arc-45 74.98,30.29 70.06,30.29 arc45 68.09,29.47 v65.52,26.9
  Bottom 0.4: FADER2.2 arc90 22.04,44.89 v23.92,44.89 | v33.77,43.3 arc45 36.07,42.35 38.06,42.35 arc-45 42.61,40.47 53.97,29.11 arc45 55.78,28.36 61.61,28.36 arc-45 63.13,27.72 arc45 65.12,26.9 v65.52,26.9 | v99.17,41.88 arc-90 97.9,43.15 IC6.14
N$15  (via drill 0.6)
  Top 0.4: v32.66,42.19 v23.77,42.19 | v96.95,41.88 92.95,37.88 arc-45 90.33,36.8 82.8,36.8 arc45 80.13,35.69 76.18,31.74 arc-45 74.58,31.08 67.74,31.08 arc45 64.31,29.66 v61.71,27.06
  Bottom 0.4: IC6.13 96.63,42.64 arc45 v96.95,41.88 | v32.66,42.19 arc45 34.19,41.56 37.55,41.56 arc-45 41.62,39.87 53.41,28.08 arc45 55.88,27.06 v61.71,27.06 | v23.77,42.19 22.62,42.19 arc-45 19.96,43.3 17.92,45.34 arc45 14.4,46.8 4.63,46.8 arc-90 3.65,47.78 FADER1.2
N$16  (via drill 0.6)
  Top 0.4: GLIDE.P$3 99.39,6.52 arc45 105.11,8.89 v107.74,11.53
  Bottom 0.4: C3.1 89.96,8.52 GLIDE.P$2 GLIDE.P$3 | v107.74,11.53 108.11,11.9 arc-45 109.15,12.33
  Bottom 0.61: IC2.3 109.18,12.35 109.15,12.33
N$17
  Bottom 0.4: R6.1 R7.2 T1.1
N$18  (via drill 0.6)
  Top 0.4: v19.32,16.61 arc-45 20.11,14.69 20.11,11.43 arc90 29.07,2.48 105.04,2.48 arc-45 106.4,1.91 arc45 107.34,1.53 arc90 108.7,2.88 108.7,5.73 arc45 v107.74,8.04
  Bottom 0.4: R61.2 20.5,19.02 arc-45 19.62,16.91 v19.32,16.61 | v107.74,8.04 107.74,8.99 108.55,9.79
  Bottom 0.61: IC2.5 108.57,9.81 108.55,9.79
N$19
  Bottom 0.4: 112.19,13.6 C6.1 114.83,13.23 R3.2 R2.1
  Bottom 0.61: IC2.2 112.22,13.62 C6.1
N$20
  Bottom 0.4: 112.19,14.87 C6.2 112.72,15.23 112.98,15.5 112.98,17.68 R4.1
  Bottom 0.61: IC2.1 112.27,14.89 C6.2
N$21  (via drill 0.6)
  Top 0.4: v115.25,19.63 104.86,28.52 CV_OUT.TIP
  Bottom 0.4: v115.25,19.63 R4.2 R4.2 arc-90 117.11,16.18 117.11,15.62 R2.2
N$22
  Bottom 0.4: R10.2 72.66,35.05 T2.1 72.83,37.11 R9.1
N$23
  Bottom 0.4: R9.2 75.36,33.73 arc-45 RESET.TIP
N$24
  Bottom 0.4: 102.67,8.52 C7.1 99.91,8.25 R11.2 | 97.52,6.19 R12.1 97.42,6.18 97.42,6.51 arc-90 99.12,8.2 R11.2 | R11.2
  Bottom 0.61: IC2.9 102.74,8.54 C7.1
N$25  (1 unrouted)
  Bottom 0.4: 104.31,7.25 arc45 103.95,7.1 103.69,6.84 arc-45 103.13,6.61 102.75,6.61 C7.2 102.39,4.08 R13.2
N$26
  Bottom 0.4: R6.2 15.54,28.76 arc45 CLK_IN.TIP arc45 15.81,26.47 17.23,25.05 arc-45 17.73,23.83 arc90 19.12,22.45 R61.1
N$27  (1 unrouted)
  Bottom 0.4: 110.17,7.25 R14.2
  Bottom 0.61: IC2.6 IC2.7
N$28  (via drill 0.6)
  Top 0.4: CLOCK_OUT.TIP arc-90 48.85,24.63 48.85,16.52 arc90 61.3,4.07 96.39,4.07 arc45 97.34,4.46 97.43,4.55 arc-45 98.18,4.86 102.44,4.86 arc-45 v107.43,2.8
  Bottom 0.4: v107.43,2.8 110.16,2.8 R14.1
N$29  (via drill 0.6)
  Top 0.4: CLK_IN.NORM 17.61,20.02 arc-90 21,16.63 21,11.61 arc90 29.34,3.27 97.06,3.27 arc45 v98.22,3.75
  Bottom 0.4: R11.1 99.86,6.24 100.12,5.97 100.12,3.81 R13.1 100.17,3.75 v98.22,3.75
N$30  (via drill 0.6)
  Top 0.4: RATE.P$2 29.96,8.52 arc-90 32.35,10.92 36.34,10.92 arc90 42.66,16.76 42.66,30.05 arc-17 43.77,37.69 arc15 v44.24,42.45
  Bottom 0.4: IC5.22 48.37,56.9 arc47 v44.24,42.45
N$31
  Bottom 0.4: R15.1 11.22,48.33 FADER1.K
N$32
  Bottom 0.4: 9.84,64.42 C10.1 7.62,64.47 R16.1 R17.2
  Bottom 0.61: IC3.2 9.9,64.36 9.84,64.42
N$33
  Bottom 0.4: 11.44,63.15 arc45 11.07,63 arc-45 10.67,62.83 10.16,62.83 C10.2 R18.1
  Bottom 0.61: IC3.1 11.16,63.09 11.07,63
N$34
  Bottom 0.4: R16.2 7.57,60.45 R18.2 2.54,60.13 arc-90 0.75,61.93 0.75,92.02 arc-45 1.45,93.72 2.4,94.67 arc45 D3.A
N$35
  Bottom 0.4: R25.1 41.07,48.48 FADER3.K
N$36
  Bottom 0.4: R20.1 26.15,48.4 FADER2.K
N$37
  Bottom 0.4: 9.91,69.5 C12.1 7.62,69.61 R21.1 R22.2 5.08,69.71
  Bottom 0.61: IC3.6 10.02,69.44 C12.1
N$38
  Bottom 0.4: 11.61,70.77 arc-45 10.95,71.04 arc45 10.46,71.24 10.16,71.24 C12.2 R23.1
  Bottom 0.61: IC3.7 12.18,70.77 11.61,70.77
N$39
  Bottom 0.4: R21.2 7.89,71.88 R23.2 7.89,78.04 arc-45 8.89,80.45 13.49,85.05 arc45 17.95,95.82 D4.A
N$40
  Bottom 0.4: 19.84,69.5 C14.1 20.11,69.66 22.13,69.61 R26.1 R27.2 24.67,69.71
  Bottom 0.61: IC3.9 19.89,69.44 20.11,69.66
N$41
  Bottom 0.4: 18.16,70.77 arc45 18.52,70.92 18.65,71.05 arc-45 19.12,71.24 19.59,71.24 C14.2 R28.1
  Bottom 0.61: IC3.8 17.65,70.92 18.52,70.92
N$42
  Bottom 0.4: R26.2 21.86,71.88 R28.2 23.17,74.1 arc90 28.21,79.14 28.21,86.34 arc-39 29.79,90.83 32.23,93.89 arc39 33,96.09 D5.A
N$43
  Bottom 0.4: FADER4.K 56.27,49.85 arc90 54.88,51.24 R30.1
N$44
  Bottom 0.4: 19.91,64.42 C16.1 22.13,64.47 R31.1 R32.2
  Bottom 0.61: IC3.13 19.9,64.36 C16.1
N$45
  Bottom 0.4: 18.34,63.15 arc-45 18.66,63.02 arc45 19.11,62.83 19.59,62.83 C16.2 R33.1
  Bottom 0.61: IC3.14 18.28,63.09 18.34,63.15
N$46
  Bottom 0.4: R31.2 22.18,60.45 R33.2 27.32,60.13 arc90 29,61.82 29,81.06 arc-45 31.38,91.3 35.99,95.9 arc-45 37.14,96.38 46.44,96.38 arc-45 46.62,96.31 arc45 47.02,96.14 47.77,96.14 D6.A
N$47
  Bottom 0.4: R35.1 70.6,46.64 70.6,46.64 arc45 71.27,48.26 FADER5.K
N$48
  Bottom 0.4: 100.23,64.26 C18.1 97.95,64.15 R36.1 R37.2
  Bottom 0.61: IC4.2 100.22,64.2 C18.1
N$49
  Bottom 0.4: R38.1 C18.2 100.49,62.51 100.7,62.51 arc45 101.34,62.78 arc-45 101.85,62.99
  Bottom 0.61: IC4.1 102.58,62.99 101.85,62.99
N$50
  Bottom 0.4: R36.2 97.9,60.13 R38.2 93.01,59.81 arc-90 90.76,62.07 90.76,85.23 arc37 89.45,89.15 84.97,95.13 arc53 82.63,96.3 80.88,96.3 74.72,96.14 72.07,96.14 D7.A
N$51
  Bottom 0.4: R40.1 86.15,48.4 FADER6.K
N$52
  Bottom 0.4: 100.39,69.34 C20.1 97.95,69.61 R41.1 R42.2
  Bottom 0.61: IC4.6 100.5,69.28 C20.1
N$53
  Bottom 0.4: 101.95,70.61 arc-45 101.54,70.78 101.27,71.05 arc45 100.81,71.24 100.49,71.24 C20.2 R43.1
  Bottom 0.61: IC4.7 102.58,70.61 101.95,70.61
N$54
  Bottom 0.4: R41.2 98.22,71.88 R43.2 98.06,74.1 98.06,78.62 arc45 97.33,80.39 88.12,93 arc-33 D8.A
N$55
  Bottom 0.4: R45.1 101.23,48.31 FADER7.K
N$56
  Bottom 0.4: 110.01,69.34 C22.1 112.46,69.61 R46.1 R47.2
  Bottom 0.61: IC4.9 109.9,69.28 C22.1
N$57
  Bottom 0.4: 108.4,70.61 arc45 108.9,70.82 109.13,71.05 arc-45 109.61,71.24 109.92,71.24 C22.2 R48.1
  Bottom 0.61: IC4.8 108.64,70.55 108.9,70.82
N$58
  Bottom 0.4: R46.2 112.19,71.88 R48.2 112.51,74.26 112.51,79.49 arc45 111.94,80.86 102.67,93.37 arc-47 D9.A
N$59
  Bottom 0.4: R50.1 116,48.55 FADER8.K
N$60
  Bottom 0.4: 110.24,64.26 C24.1 112.61,64.31 R51.1 R52.2
  Bottom 0.61: IC4.13 107.9,64.26 110.24,64.26
N$61
  Bottom 0.4: R53.1 110.29,62.3 C24.2 110.08,62.51 109.66,62.51 arc-45 109.1,62.75 109.09,62.75 arc45 108.52,62.99
  Bottom 0.61: IC4.14 107.9,62.99 108.52,62.99
N$62
  Bottom 0.4: R51.2 112.19,61.88 R53.2 117.93,59.97 arc90 119.17,61.21 119.17,86.02 arc45 117.87,89.16 arc-45 117,91.27 D10.A
N$63  (via drill 0.6)
  Top 0.4: SW1.1 58.36,11.92 arc45 58.85,13.1 58.85,16.38 arc45 58.35,17.58 arc-45 57.74,19.06 57.74,49.84 arc45 57.08,51.42 arc-45 56.63,52.52 56.63,57.43 arc-45 57.19,58.79 58.42,60.02 arc45 59.17,61.83 59.17,66.2 arc45 58.97,66.68 arc-90 58.97,68.67 v59.96,69.66
  Bottom 0.4: v59.96,69.66 61.55,71.25 IC5.2 | R55.2 58.4,8.76 arc-90 57.42,9.75 SW1.1 SW1.2
N$64  (via drill 0.6)
  Top 0.4: v57.42,66.48 57.45,66.46 arc-45 58.37,64.22 58.37,62.44 arc-45 57.52,60.39 56.38,59.25 arc45 55.83,57.94 55.83,50.78 arc-45 55.6,50.22 55.42,50.04 arc45 55.04,49.11 55.04,46.09 arc-45 54.41,40.08 53.48,39.15 arc45 52.82,37.55 52.82,17.96 arc90 SW1.A
  Bottom 0.4: IC5.9 64.53,66.19 arc45 63.82,66.48 v57.42,66.48
N$65
  Bottom 0.4: R56.2 SW1.K
N$66
  Bottom 0.4: R57.2 arc45 31.61,31.87 DIRSW.2
N$67  (via drill 0.6)
  Top 0.4: v71.71,52.51 71.71,55.28 arc45 71.31,56.25 70.88,56.67 arc-90 70.88,59.14 v71.07,59.34 | v49.48,43.12 arc-45 47.86,43.79 47.15,44.5 arc45 45.49,45.18 44.57,45.18 arc90 41.7,42.32 41.7,40.98 arc-90 38.28,37.56 v34.08,37.56
  Bottom 0.4: v71.71,52.51 71.24,52.05 arc-45 69.68,51.4 63.83,51.4 arc45 61.76,50.55 55.74,44.53 arc-45 52.34,43.12 v49.48,43.12 | v71.07,59.34 arc-45 69.67,59.92 IC5.10 | DIRSW.1 25.19,33.59 arc-90 28.67,37.06 R58.2 32.87,37.06 arc45 v34.08,37.56
N$68  (via drill 0.6)
  Top 0.4: v71.71,57.59 72.38,56.92 arc-45 73.45,54.33 v73.45,52.35 | v50.75,41.69 arc-45 46.96,43.26 46.48,43.75 arc45 44.92,44.39 arc90 42.5,41.97 42.5,39.93 arc-45 v41.39,37.25
  Bottom 0.4: IC5.11 70.27,58.19 arc45 v71.71,57.59 | v73.45,52.35 72.64,51.54 arc-45 70.39,50.61 64.34,50.61 arc45 62.06,49.66 55.95,43.55 arc-45 52.6,42.17 51.23,42.17 v50.75,41.69 | DIRSW.3 36.14,35 arc-45 R59.2 arc45 41.26,37.12 v41.39,37.25
N$69
  Bottom 0.4: IC6.3 97.9,37.57 arc45 98.02,37.29 arc90 103.98,37.29 105.97,39.28 arc-45 107.19,39.78 107.44,39.78 R60.2
N$70
  Bottom 0.4: TR1.2 TR1.3 arc-45 100.61,32.65 100.01,32.05 arc-90 91.42,32.05 RANGE.2
N$71
  Bottom 0.4: D6.C 52.36,98.42 GATE4.TIP
N$72
  Bottom 0.4: D5.C 33.1,98.52 GATE3.TIP
N$73
  Bottom 0.4: D4.C 18.05,98.52 GATE2.TIP
N$74
  Bottom 0.4: D3.C 7.36,98.42 GATE1.TIP
N$75
  Bottom 0.4: D10.C 116.9,98.52 GATE8.TIP
N$76
  Bottom 0.4: D9.C GATE7.TIP
N$77
  Bottom 0.4: D8.C GATE6.TIP
N$78
  Bottom 0.4: D7.C 67.56,98.42 GATE5.TIP
RESET  (via drill 0.6)
  Top 0.4: v79.96,53.31 v79.96,57.43
  Bottom 0.4: T2.3 71.95,39.48 arc90 72.98,40.51 72.98,41.56 R8.1 79.25,41.88 arc90 80.6,43.22 80.6,45.85 arc45 80.26,46.66 arc-45 79.8,47.76 79.8,53.15 v79.96,53.31 | v79.96,57.43 79.96,71.66 arc90 74.98,76.64 64.75,76.64 arc45 63.89,76.29 61.02,73.41 arc90 IC5.1
RST  (via drill 0.6)
  Top 0.4: ISP1.5 60.5,53.56 arc-45 59.96,54.87 v59.96,67.75
  Bottom 0.4: IC5.29 59.3,68.03 arc45 v59.96,67.75

## Text on the board
tPlace: FADER1 | FADER2 | FADER3 | FADER4 | FADER7 | FADER8 | FADER5 | FADER6 | Pure Seq V2.2 | RATE | SLEW | PLAYPAUSESW | copyright GMSN Ltd 2016
bPlace: Pure Seq V2.2 | U5 | T2 | T1 | -12V